# Altium PCB Badge_V2.PcbDoc
Units mil, origin at the board's own origin, x right, y up, seen from the top; angles counter-clockwise.
Board outline 2068 x 3859.51 mil, 2 copper layers (Top Layer, Bottom Layer); 42 components, 35 nets, 110 pads, 17 vias.
Unrouted connection lines stored in the file: 1.
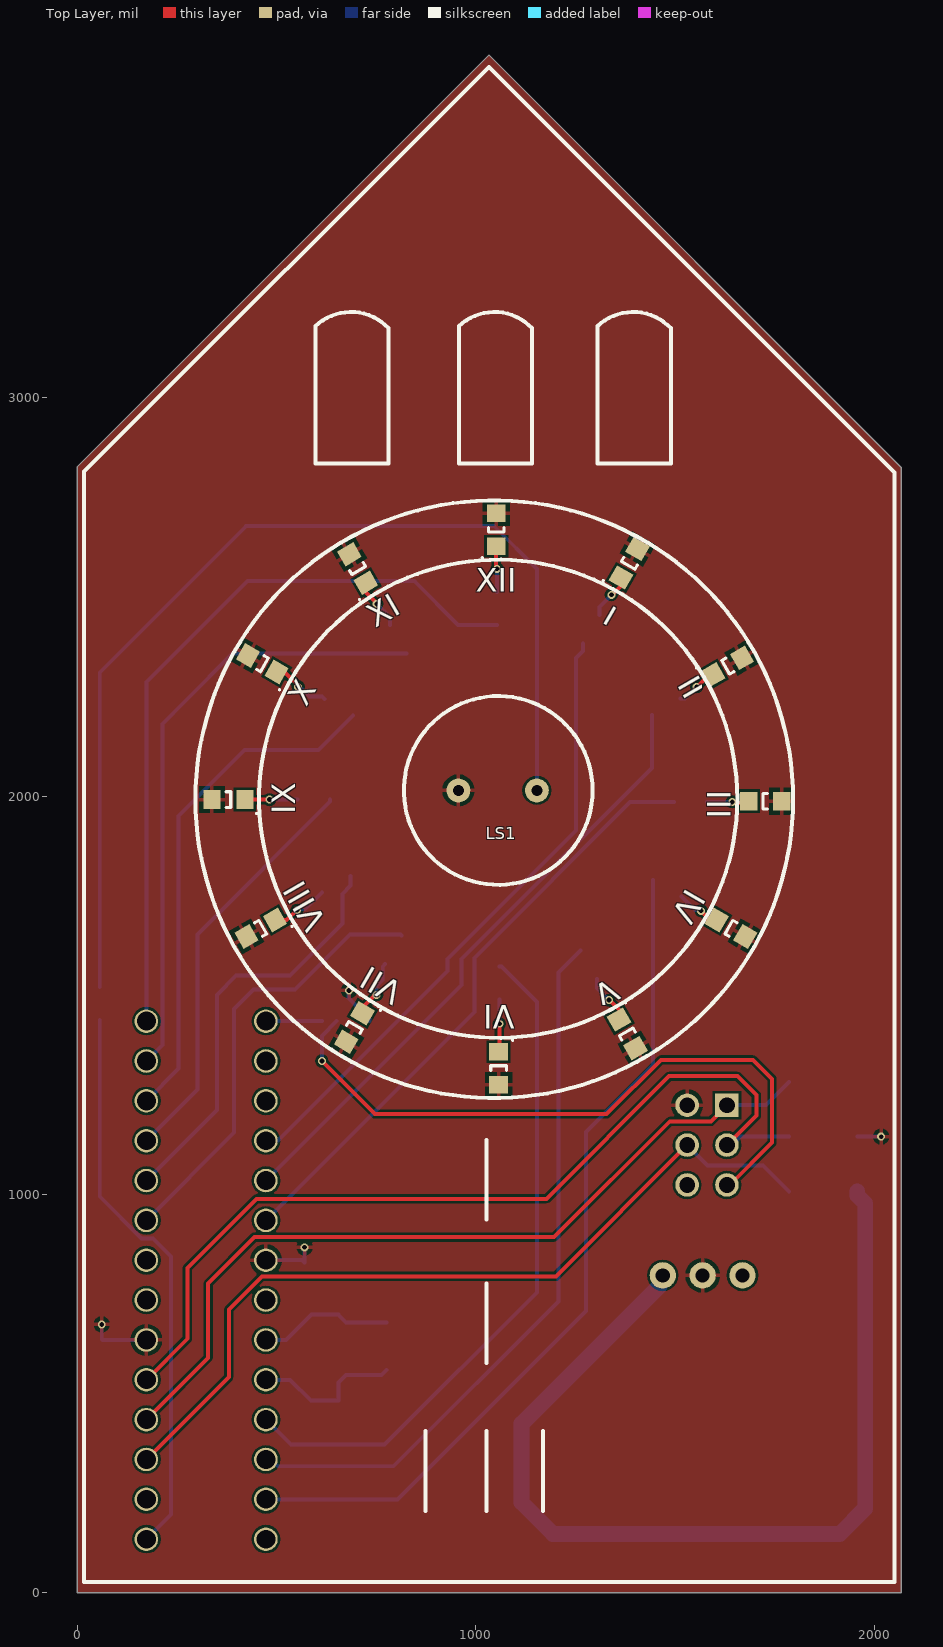
[diagram p0: Top Layer view]
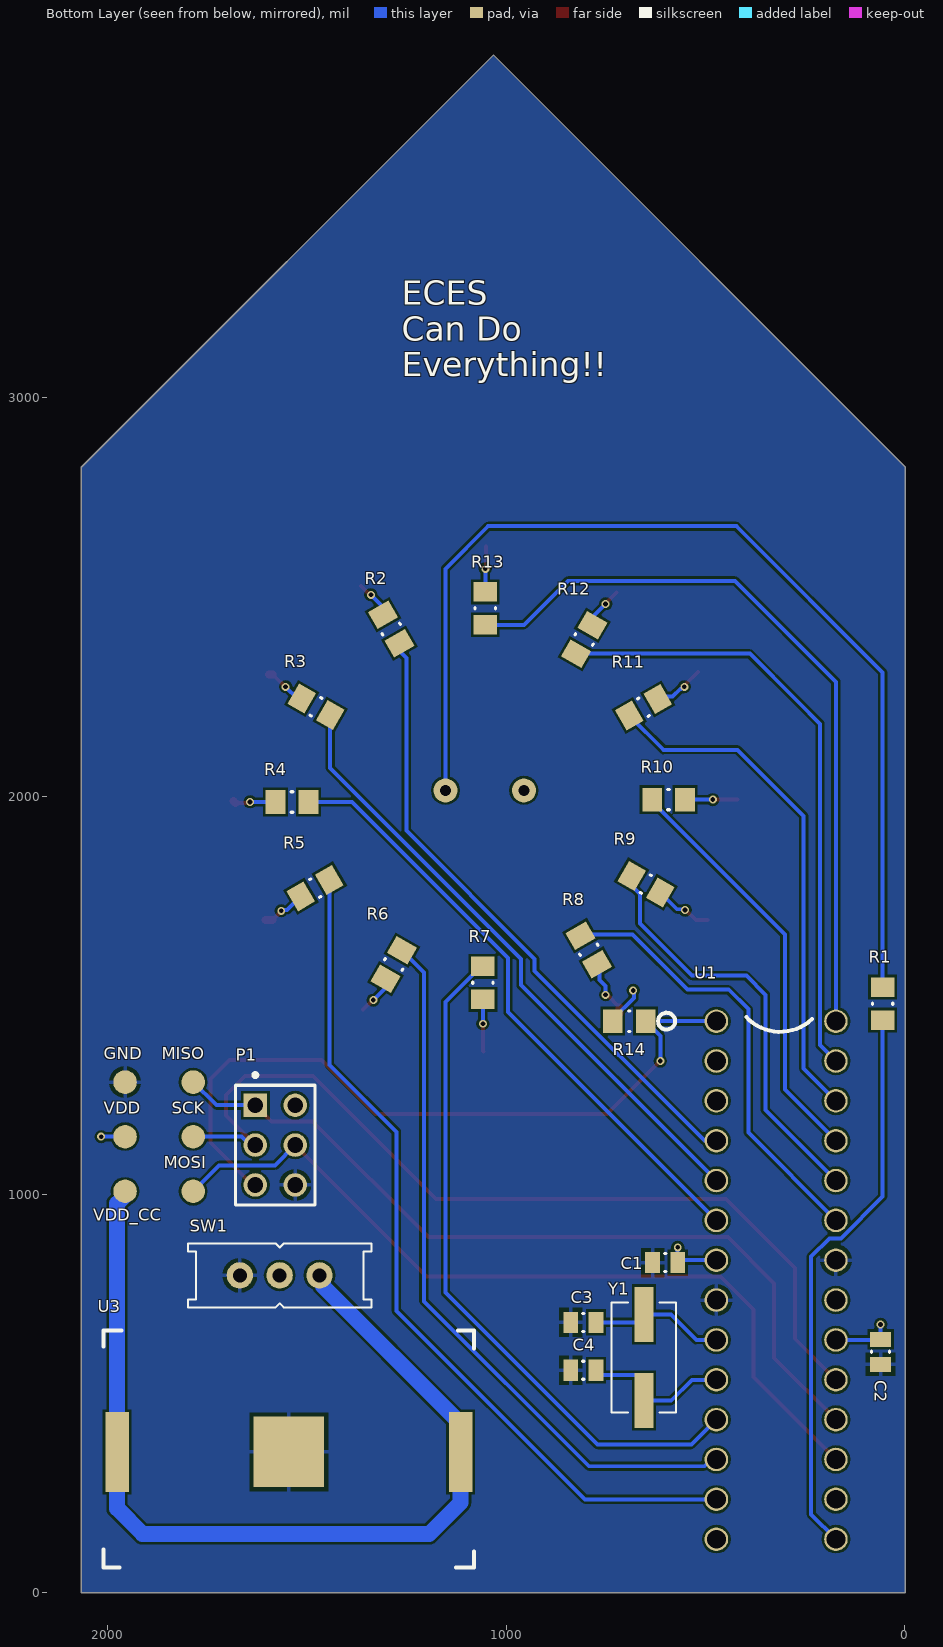
[diagram p1: Bottom Layer view, seen from below]
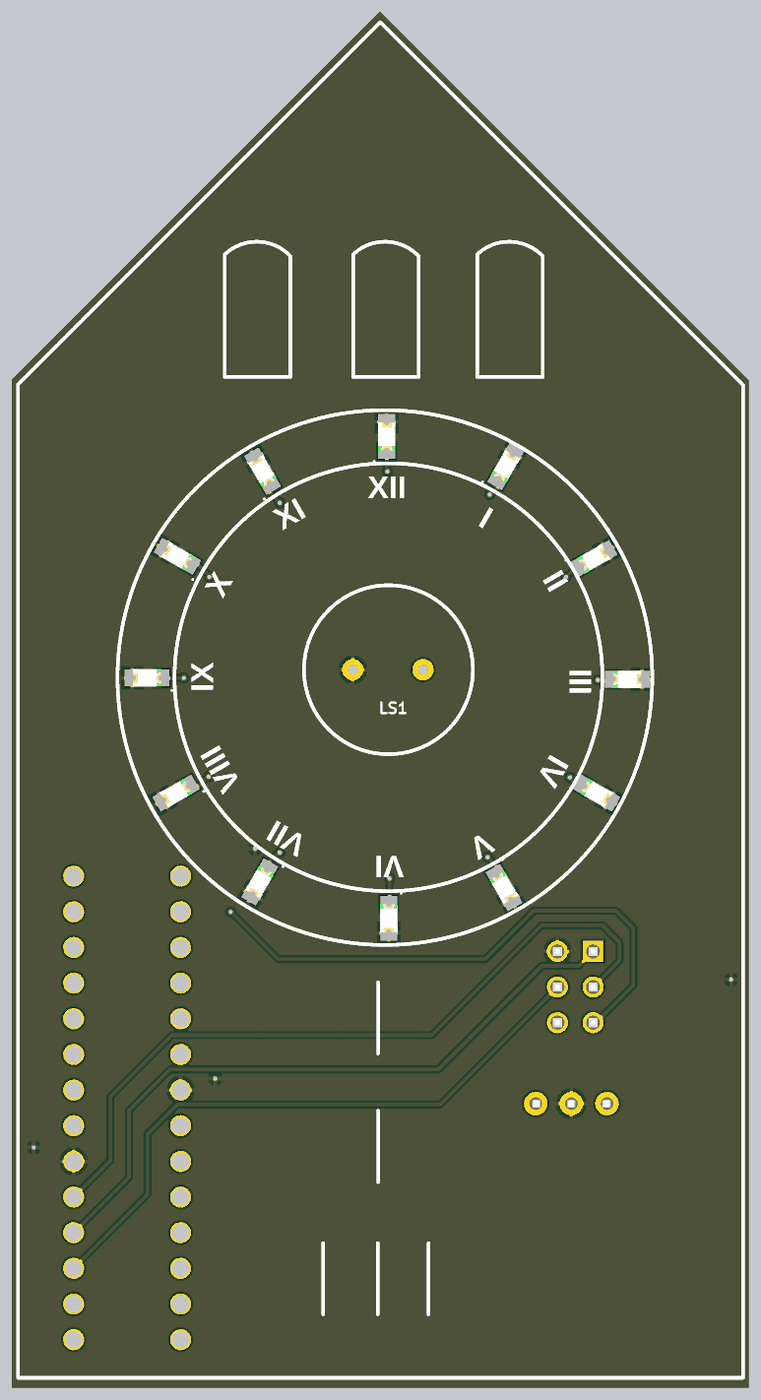
[diagram p2: 3D render of the assembled board from above, using the file's embedded part models]

## Layer stack, top to bottom
Top Solder: solder mask 0.4, Solder Resist, Dk 3.5
Top Layer: signal copper 1.4
Dielectric 1: dielectric 12.6, FR-4, Dk 4.8
Bottom Layer: signal copper 1.4
Bottom Solder: solder mask 0.4, Solder Resist, Dk 3.5

## Board outline
-1,0 -1,2826.02 1032.49,3859.51 2067,2825 2067,0

## Design rules (kind name [scope] priority, off if disabled: settings)
Clearance [All] p1: gap=6 ignorepadtopadclearanceinfootprint=FALSE except(0: Arc-Text Arc-Hole Track-Text Track-Hole SMDPad-Text SMDPad-Hole THPad-Text THPad-Hole Via-Text Via-Hole Fill-Text Fill-Hole Poly-Text Poly-Hole Region-Text Region-Hole Text-Text Text-Hole)
MinimumSolderMaskSliver [All] p1: minsoldermaskwidth=4
PolygonConnect [All] p1: connectstyle=Relief reliefconductorwidth=10 reliefentries=4 polygonreliefangle="90 Angle" airgapwidth=10
RoutingVias [All] p1: holewidth=28 width=50 viastyle="Through Hole" minholewidth=28 minwidth=50 maxholewidth=28 maxwidth=50
SilkToSilkClearance [All] p1: silktosilkclearance=0
SilkToSolderMaskClearance [IsPad] p1: minsilkscreentomaskgap=0 clearancetoexposedcopper=TRUE
SolderMaskExpansion [All] p1: expansion=2 istentingtop=FALSE
Width [All] p1: maxlimit=100 minlimit=10 preferedwidth=10
27 further rules are at their usual default settings.

## Components (designator, comment, footprint, x,y, rotation, side; value= is the part's Value field where it differs from the comment)
C1 ".1uF" CAPC0805(2012)145_L 601.5,829 r180 bottom
C2 ".1uF" CAPC0805(2012)145_L 61,605 r90 bottom
C3 "33pF" CAPC0805(2012)145_L 807,679 r180 bottom
C4 "33pF" CAPC0805(2012)145_L 807,559 r180 bottom
GND "TP" TP 1957,1282 r90 bottom
LED1 "Red" LED_0805 1385,2584 r60 top
LED2 "Red" LED_0805 1632,2326 r30 top
LED3 "Red" LED_0805 1726,1987 r0 top
LED4 "Red" LED_0805 1640,1668 r330 top
LED5 "Red" LED_0805 1380,1403 r300 top
LED6 "Red" LED_0805 1057,1317 r270 top
LED7 "Red" LED_0805 695,1419 r240 top
LED8 "Red" LED_0805 460,1668 r210 top
LED9 "Red" LED_0805 379,1991 r180 top
LED10 "Red" LED_0805 464,2332 r150 top
LED11 "Red" LED_0805 703,2571 r120 top
LED12 "Red" LED_0805 1051,2668 r90 top
LS1 "Piezo" Piezo 956,2014 r0 top
MISO "TP" TP 1786,1282 r90 bottom
MOSI "TP" TP 1786,1008 r90 bottom
P1 "CN-2P-M-R6" HRWN-M20-9980346_V 1545,1159 r180 bottom
R1 "220R" RESC0805(2012)_M 56,1479 r90 bottom
R2 "220R" RESC0805(2012)_M 1289,2419 r240 bottom
R3 "220R" RESC0805(2012)_M 1478,2224 r210 bottom
R4 "220R" RESC0805(2012)_M 1538,1985 r180 bottom
R5 "220R" RESC0805(2012)_M 1480,1769 r150 bottom
R6 "220R" RESC0805(2012)_M 1283,1577 r120 bottom
R7 "220R" RESC0805(2012)_M 1059,1531 r90 bottom
R8 "220R" RESC0805(2012)_M 793,1614 r60 bottom
R9 "220R" RESC0805(2012)_M 650,1779 r30 bottom
R10 "220R" RESC0805(2012)_M 593,1991 r0 bottom
R11 "220R" RESC0805(2012)_M 656,2223 r330 bottom
R12 "220R" RESC0805(2012)_M 805,2393 r300 bottom
R13 "220R" RESC0805(2012)_M 1053,2471 r270 bottom
R14 "10K" RESC0805(2012)_M 691.8,1435 r180 bottom
SCK "TP" TP 1786,1145 r90 bottom
SW1 "SPDT" EG1218_EG1218 1569,797 r0 bottom
U1 "ATMEGA328" 1-2199298-9 83,695 r90 bottom
U3 "Coin Cell" Batt 1546,354 r0 bottom
VDD "TP" TP 1957,1145 r90 bottom
VDD_CC "TP" TP 1957,1008 r90 bottom
Y1 "16MHz" XTAL_ECS-160-20-3X-TR 655,591 r90 bottom

## Footprints (in the part's own frame and the unit in brackets; to place one, negate y for a bottom-side part, rotate by r counter-clockwise, add the part's x,y. Pads: shape width x height; smd on the part's side, far side on the other; paste and mask are expansions set on the pad)
1-2199298-9 [mm] "CONN IC DIP SOCKET 28POS TIN"
  round 1.5 hole 1.2: 1(18.796,9.906) 2(16.256,9.906) 3(13.716,9.906) 4(11.176,9.906) 5(8.636,9.906) 6(6.096,9.906) 7(3.556,9.906) 8(1.016,9.906) 9(-1.524,9.906) 10(-4.064,9.906) 11(-6.604,9.906) 12(-9.144,9.906) 13(-11.684,9.906) 14(-14.224,9.906) 15(-14.224,2.286) 16(-11.684,2.286) 17(-9.144,2.286) 18(-6.604,2.286) 19(-4.064,2.286) 20(-1.524,2.286) 21(1.016,2.286) 22(3.556,2.286) 23(6.096,2.286) 24(8.636,2.286) 25(11.176,2.286) 26(13.716,2.286) 27(16.256,2.286) 28(18.796,2.286)
  silkscreen extent 18.12,3.81 19.33,13.62, body extent -15.49,0.97 20.07,10.97, height 5
Batt [mm] "Coin Cell"
  rect 4.5x4.5 smd: GND(0,0)
  rect 1.5x5.1 smd: VDD(-10.95,0) VDD(10.95,0)
  silkscreen extent -11.81,-7.75 11.81,7.37, body extent -11.81,-7.75 11.81,7.37, height 0.25
CAPC0805(2012)145_L [mm] "Chip Capacitor, Body 2.0x1.2mm, Height 1.45mm, IPC High Density"
  rect 0.95x1.35 smd: 1(-0.8,0) 2(0.8,0)
  silkscreen extent -0.05,-0.58 0.05,0.58, body extent -1.1,-0.72 1.1,0.72, height 1.45
EG1218_EG1218 [mil]
  round 66 hole 35.43: 1(-100,0) 2(0,0) 3(100,0)
  silkscreen extent -230,-80 230,80, body extent -228,-79 228,79, height 303
HRWN-M20-9980346_V [mm] "THD, 6-Leads, Body 7.62x5.08mm, Pitch 2.54mm"
  rect 1.5x1.5 hole 1: 1(-2.159,1.651)
  round 1.5 hole 1: 2(0.381,1.651) 3(-2.159,-0.889) 4(0.381,-0.889) 5(-2.159,-3.429) 6(0.381,-3.429)
  silkscreen extent -3.43,-4.7 1.65,3.7, body extent -3.43,-4.7 1.65,2.92, height 8.12
LED_0805 [mm] "Chip LED, 2-Leads, Body 2.0x1.3mm, IPC Medium Density"
  rect 1.1x1.2 smd: 1(-1.05,0) 2(1.05,0)
  silkscreen extent -1.83,-0.5 0.15,0.94, body extent -1,-0.62 1,0.63, height 0.68
Piezo [mil]
  round 60 hole 27.56: 1(0,0) 2(196.85,0)
  silkscreen extent -137,-237 337,237, body extent -140,-240 340,240, height 256
RESC0805(2012)_M [mm] "Chip Resistor, Body 2.0x1.3mm, IPC Low Density"
  rect 1.25x1.5 smd: 1(-1.05,0) 2(1.05,0)
  silkscreen extent -0.05,-0.65 0.05,0.65, body extent -1.1,-0.67 1.1,0.67, height 0.7
TP [mm] "3mm SM Test Point"
  round 1.5 smd: 1(0,0)
XTAL_ECS-160-20-3X-TR [mm]
  rect 3.5x1.2 smd: 1(-2.75,0) 2(2.75,0)
  silkscreen extent -3.5,-2.05 3.5,2.05

## Part data
C1 C2: library part CAP100n, "capacitor", Manufacturer=Yageo, MPN=CC0805ZRY5V9BB104
C3 C4: library part CAP33p, "capacitor", Manufacturer=Yageo, MPN=CC0805JRNPO9BN330
GND MISO MOSI SCK VDD VDD_CC: library part TestPoint, "Test Point", Manufacturer=N/A, MPN=N/A
LED1 LED2 LED3 LED4 LED5 LED6 LED7 LED8 LED9 LED10 LED11 LED12: library part LED_0805, "Red 625nm LED Indication - Discrete 2V 0805 (2012 Metric)", Manufacturer="Würth Elektronik", MPN=150080RS75000
LS1: "AUDIO PIEZO TRANSDUCER 30V TH", Manufacturer="TDK Corporation", MPN=PS1240P02BT
R1 R2 R3 R4 R5 R6 R7 R8 R9 R10 R11 R12 R13: library part RES, "resistor", Manufacturer=Yageo, MPN=RC0805JR-071KL
R14: library part RES10K, "resistor", Manufacturer=Yageo, MPN=RC0603JR-0710KL
SW1: library part SPDT_Switch, "Slide Switch SPDT Through Hole", Manufacturer=E-Switch, MPN=EG1218
U1: library part ATMEGA328-PU, "AVR AVR® ATmega Microcontroller IC 8-Bit 20MHz 32KB (16K x 16) FLASH 28-PDIP", Manufacturer="Microchip Technology", MPN=ATMEGA328-PU
U3: library part Batt, "Battery Retainer Coin, 20.0mm 1 Cell SMD (SMT) Tab", Manufacturer="Keystone Electronics", MPN=3034TR
Y1: library part ECS-160-20-3X-TR, "16MHz Â±30ppm Crystal 20pF 50 Ohms HC-49/US", Manufacturer="ECS Inc.", MPN=ECS-160-20-3X-TR

## Via types
v1: diameter 20, hole 12, Top Layer to Bottom Layer, tented both sides, 17 vias

## Nets (pads, with @x,y where several pads share a name; then routed paths per layer and width w, separated by ;. In a path a pad name is that pad's centre, name@x,y a point inside that pad or via, vN(x,y) a via of type N, cw(c..) or ccw(c..) an arc to the next point about the centre after c; other vN are vias at no path point)
GND: C1.1 C2.1 C3.1 C4.1 GND.1 P1.6 SW1.3 U1.8 U1.22 U3.GND
LED1: R2.2 U1.4 | length 1595.1
  Bottom Layer w10: U1.4 502.83,1135 929,1561.17 929,1591 1251,1913 1251,2346.27 1268.33,2363.6 R2.2
LED2: R3.2 U1.5 | length 1569.8
  Bottom Layer w10: U1.5 963.37,1525.37 963.37,1591.37 1442.2,2070.2 R3.2
LED3: R4.2 U1.6 | length 1538.1
  Bottom Layer w10: U1.6 996,1458 996,1593.75 1387.25,1985 R4.2
LED4: R5.2 U1.13 | length 2150.3
  Bottom Layer w10: U1.13 803,235 1276,708 1276,1157 1444.2,1325.2 R5.2
LED5: R6.2 U1.12 | length 1816.2
  Bottom Layer w10: U1.12 486.27,335 503.27,318 793,318 1207,732 1207,1557.47 R6.2
LED6: R7.2 U1.11 | length 1724.4
  Bottom Layer w10: U1.11 536,372 771,372 1152.85,753.85 1152.85,1483.41 1063.92,1572.34 R7.2
LED7: R8.2 U1.23 | length 1120.4
  Bottom Layer w10: U1.23 393,1155 393,1465 442,1514 545.73,1514 684,1652.26 811.21,1652.26 R8.2
LED8: R9.2 U1.24 | length 1056.7
  Bottom Layer w10: U1.24 350,1212 350,1501 398,1549 534,1549 665,1680 665,1754.61 685.8,1775.41 R9.2
LED9: R10.2 U1.25 | length 1047.1
  Bottom Layer w10: U1.25 301,1263 301,1652.74 634.34,1986.08 R10.2
LED10: R11.2 U1.26 | length 1291
  Bottom Layer w10: U1.26 254,1316 254,1950.14 419.53,2115.67 605.14,2115.67 R11.2
LED11: R12.2 U1.27 | length 1548.3
  Bottom Layer w10: U1.27 213,1375 213,1428.48 ccw(c173,1435) 213,1441.52 213,2181.1 269.72,2237.81 389.1,2357.2 R12.2
LED12: R13.2 U1.28 | length 1882.2
  Bottom Layer w10: U1.28 173,2286.48 426.52,2540 845.28,2540 955.62,2429.66 R13.2
MISO: MISO.1 P1.1 U1.18 | length 2073.4
  Top Layer w10: U1.18 328.19,590.19 328.19,777.19 444,893 1196,893 1486.47,1183.47 1589.47,1183.47 P1.1
  Bottom Layer w10: P1.1 1728,1224 MISO.1
MOSI: MOSI.1 P1.4 U1.17 | length 2087.3
  Top Layer w10: U1.17 380,542 380,711.72 462.75,794.47 1200.47,794.47 P1.4
  Bottom Layer w10: P1.4 1581,1073 1721,1073 MOSI.1
NetC3_2: C3.2 U1.9 Y1.2 | length 338.5
  Bottom Layer w10: U1.9 523,635 587.27,699.27 Y1.2 655,697.62 673.62,679 C3.2
NetC4_2: C4.2 U1.10 Y1.1 | length 382.3
  Bottom Layer w10: U1.10 534,535 586.27,482.73 Y1.1 655,528.01 673.62,546.63 763.13,546.63 C4.2
NetLED1_1: LED1.1 R2.1 | length 92.9
  Top Layer w10: v1@1343,2506 LED1.1@1364.33,2527.33
  Bottom Layer w10: R2.1 1309.67,2474.67 v1(1340,2505)
NetLED2_1: LED2.1 R3.1 | length 109.4
  Top Layer w10: v1@1553,2272 LED2.1@1586.33,2305.33
  Top Layer w20: LED2.1@1586.33,2305.33 LED2.1
  Bottom Layer w10: R3.1 1524.67,2244.67 v1(1554,2274)
NetLED3_1: LED3.1 R4.1 | length 109.7
  Top Layer w10: v1@1641,1982 LED3.1@1679.66,1982
  Top Layer w20: LED3.1@1679.66,1982 LED3.1
  Bottom Layer w10: R4.1 v1(1643.27,1985)
NetLED4_1: LED4.1 R5.1 | length 111.3
  Top Layer w10: v1@1566,1710 LED4.1@1587.33,1688.67
  Top Layer w20: LED4.1@1587.33,1688.67 LED4.1
  Bottom Layer w10: R5.1 1550.22,1713.91 1563.09,1713.91 v1(1565,1712)
NetLED5_1: LED5.1 R6.1 | length 100.2
  Top Layer w10: v1@1335,1488 LED5.1@1359.33,1463.67
  Bottom Layer w10: R6.1 1303.67,1518.33 v1(1334,1488)
NetLED6_1: LED6.1 R7.1 | length 124.7
  Top Layer w10: LED6.1 1059,1360.34 v1@1059,1421
  Bottom Layer w10: v1(1059,1428.48) R7.1
NetLED7_1: LED7.1 R8.1 | length 148
  Top Layer w10: LED7.1@715.67,1469.67 v1@749,1503
  Top Layer w20: LED7.1 LED7.1@715.67,1469.67
  Bottom Layer w10: v1(751,1501) 751,1523.46 766.22,1538.68 766.22,1572.09 R8.1
NetLED8_1: LED8.1 R9.1 | length 149.9
  Top Layer w10: LED8.1 524.67,1688.67 v1@553,1717
  Bottom Layer w10: v1(551.66,1713.91) 553.57,1715.83 571.7,1715.83 R9.1
NetLED9_1: LED9.1 R10.1 | length 129.3
  Top Layer w10: LED9.1 v1@480,1991
  Bottom Layer w10: v1(482,1991) R10.1
NetLED10_1: LED10.1 R11.1 | length 126.3
  Top Layer w10: LED10.1@519.67,2311.33 v1@553,2278
  Bottom Layer w10: v1(553.57,2274) 556.28,2274 561.28,2269 563.67,2269 582.72,2249.95 613.92,2249.95 R11.1
NetLED11_1: LED11.1 R12.1 | length 104.2
  Top Layer w10: LED11.1@723.67,2510.33 v1@750,2484
  Bottom Layer w10: v1(751,2482) 784.33,2448.67 R12.1
NetLED12_1: LED12.1 R13.1 | length 110.5
  Top Layer w10: v1@1051,2574 LED12.1
  Bottom Layer w10: R13.1 v1(1053,2570.15)
NetLS1_2: LS1.2 R1.2 | length 2638.9
  Bottom Layer w10: R1.2 56,2310 423,2677 1046,2677 1152.85,2570.15 LS1.2
Piezo: R1.1 U1.15 | length 1419.4
  Bottom Layer w10: R1.1 56,994.69 160.69,890 189.57,890 235,844.57 235,197 U1.15
RESET: P1.5 R14.2 U1.1 | length 1832.9
  Top Layer w10: v1@614.2,1335 747.2,1202 1328,1202 1464,1338 1695,1338 1743,1290 1743,1130 1637,1024 P1.5
  Bottom Layer w10: U1.1 613.66,1435 ; v1(613.66,1335) 613.66,1398.2 R14.2
SCK: P1.3 SCK.1 U1.19 | length 2291
  Top Layer w10: U1.19 276,638 276,816 449,989 1177,989 1485,1297 1656,1297 1703.86,1249.14 1703.86,1197.86 P1.3
  Bottom Layer w10: P1.3 1643.27,1124 1664.27,1145 SCK.1
VDD: C1.2 C2.2 LED1.2 LED2.2 LED3.2 LED4.2 LED5.2 LED6.2 LED7.2 LED8.2 LED9.2 LED10.2 LED11.2 LED12.2 LS1.1 P1.2 R14.1 SW1.2 U1.7 U1.20 VDD.1 | length 447.9
  Bottom Layer w10: v1(61,674) C2.2 62.5,635 U1.20 ; U1.7 564.01,835 C1.2 v1(570.01,867.31) ; v1(681.8,1512) 679.8,1510 679.8,1493.26 733.14,1439.92 R14.1 ; VDD.1 v1(2017,1145)
VDD_CC: SW1.1 U3.VDD VDD_CC.1 | length 2442.3
  Bottom Layer w40: SW1.1 1460.2,788.2 1460.2,770.17 1114.9,424.87 1114.9,354 1114.9,227.1 1194,148 1913,148 1977.1,212.1 1977.1,354 1977.1,977.33 1957,997.43 VDD_CC.1
pads on no net: U1.2 U1.3 U1.14 U1.16 U1.21

## Polygon pours and split planes (outlines as drawn)
GND on Bottom Layer "GND_L02_P001" (solid, remove dead copper, pour order 1): -1,0 -1,2826.02 1032.49,3859.51 2067,2825 2067,0
VDD on Top Layer "VDD_L01_P002" (solid, remove dead copper, pour order 2): -1,0 -1,2826.02 1032.49,3859.51 2067,2825 2067,0

## Silkscreen, mask and mechanical layers (free items; w line width, h text height)
Top Overlay:
  circle w10: c1056,1993 r600
  circle w10: c1046,1992 r750
  lines w10: 17,28 2051,28 2051,2812 1033,3830 17,2814 17,30 ; 597,3176 597,2835 781,2835 781,3171 ; 597,3179 cw(c686.5,3084.5) 781,3174 ; 873,206 873,406 ; 957,3176 957,2835 1141,2835 1141,3171 ; 957,3179 cw(c1046.5,3084.5) 1141,3174 ; 1026,206 1026,406 ; 1027,577 1027,777 ; 1027,937 1027,1137 ; 1168,206 1168,406 ; 1305,3176 1305,2835 1489,2835 1489,3171 ; 1305,3179 cw(c1394.5,3084.5) 1489,3174
  text "XII" at 1000,2492 h100
  text "I" at 1304,2420 h100 r330
  text "XI" at 758,2403 h100 r30
  text "II" at 1486,2269 h100 r300
  text "X" at 592,2212 h100 r60
  text "III" at 1561,2015 h100 r270
  text "IX" at 567,1954 h100 r90
  text "IV" at 1511,1781 h100 r240
  text "VIII" at 645,1693 h100 r120
  text "V" at 1327,1562 h100 r210
  text "VII" at 832,1541 h100 r150
  text "VI" at 1098,1495 h100 r180
Bottom Overlay:
  text "ECES / Can Do  / Everything!!" at 1262,3053 h60
Mechanical 2:
  the board outline again, w10